# Altium PCB esp32_master.PcbDoc
Units mm, origin at the board's own origin, x right, y up, seen from the top; angles counter-clockwise.
Board outline 70.74 x 57.28 mm, 2 copper layers (Top Layer, Bottom Layer); 8 components, 10 nets, 60 pads, 0 vias.
Unrouted connection lines stored in the file: 1.
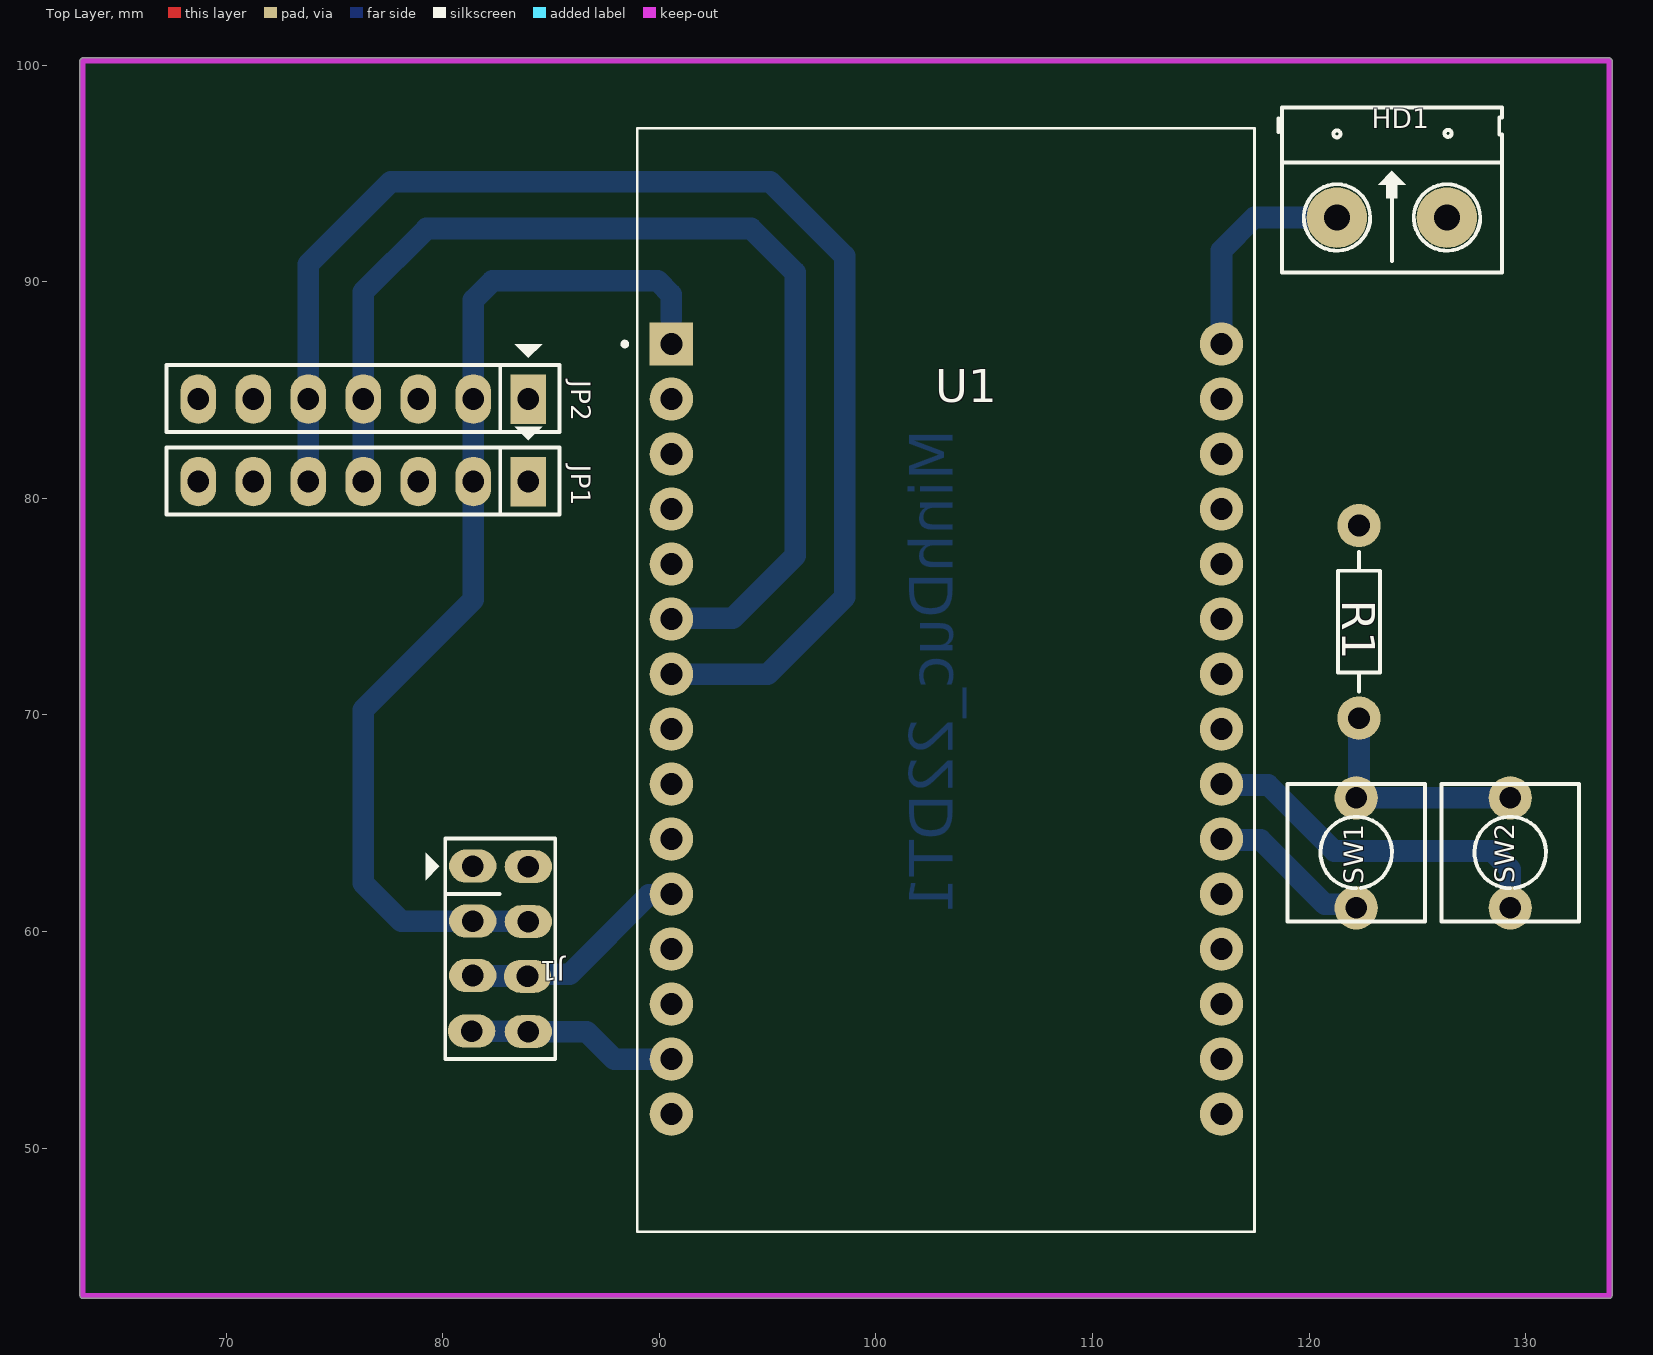
[diagram p0: Top Layer view]
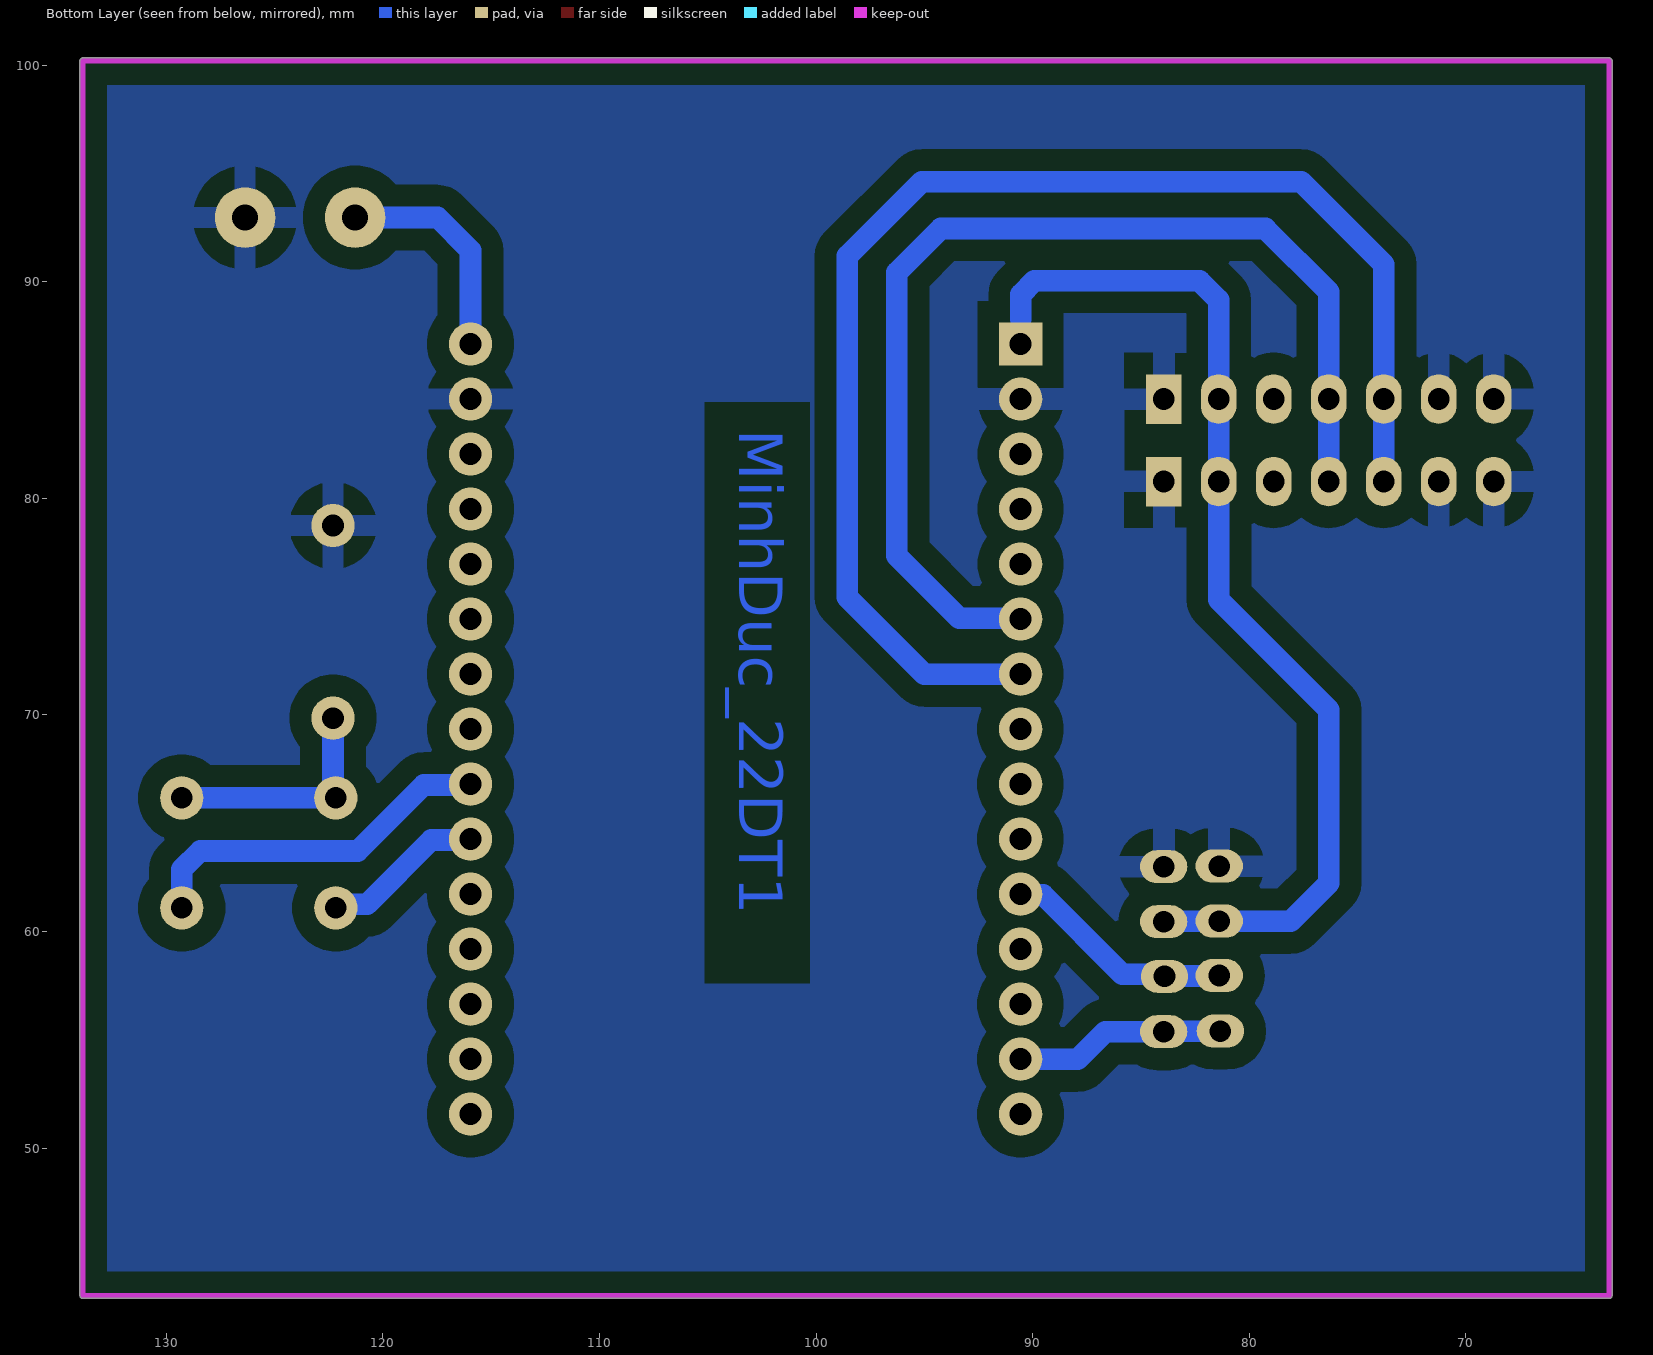
[diagram p1: Bottom Layer view, seen from below]
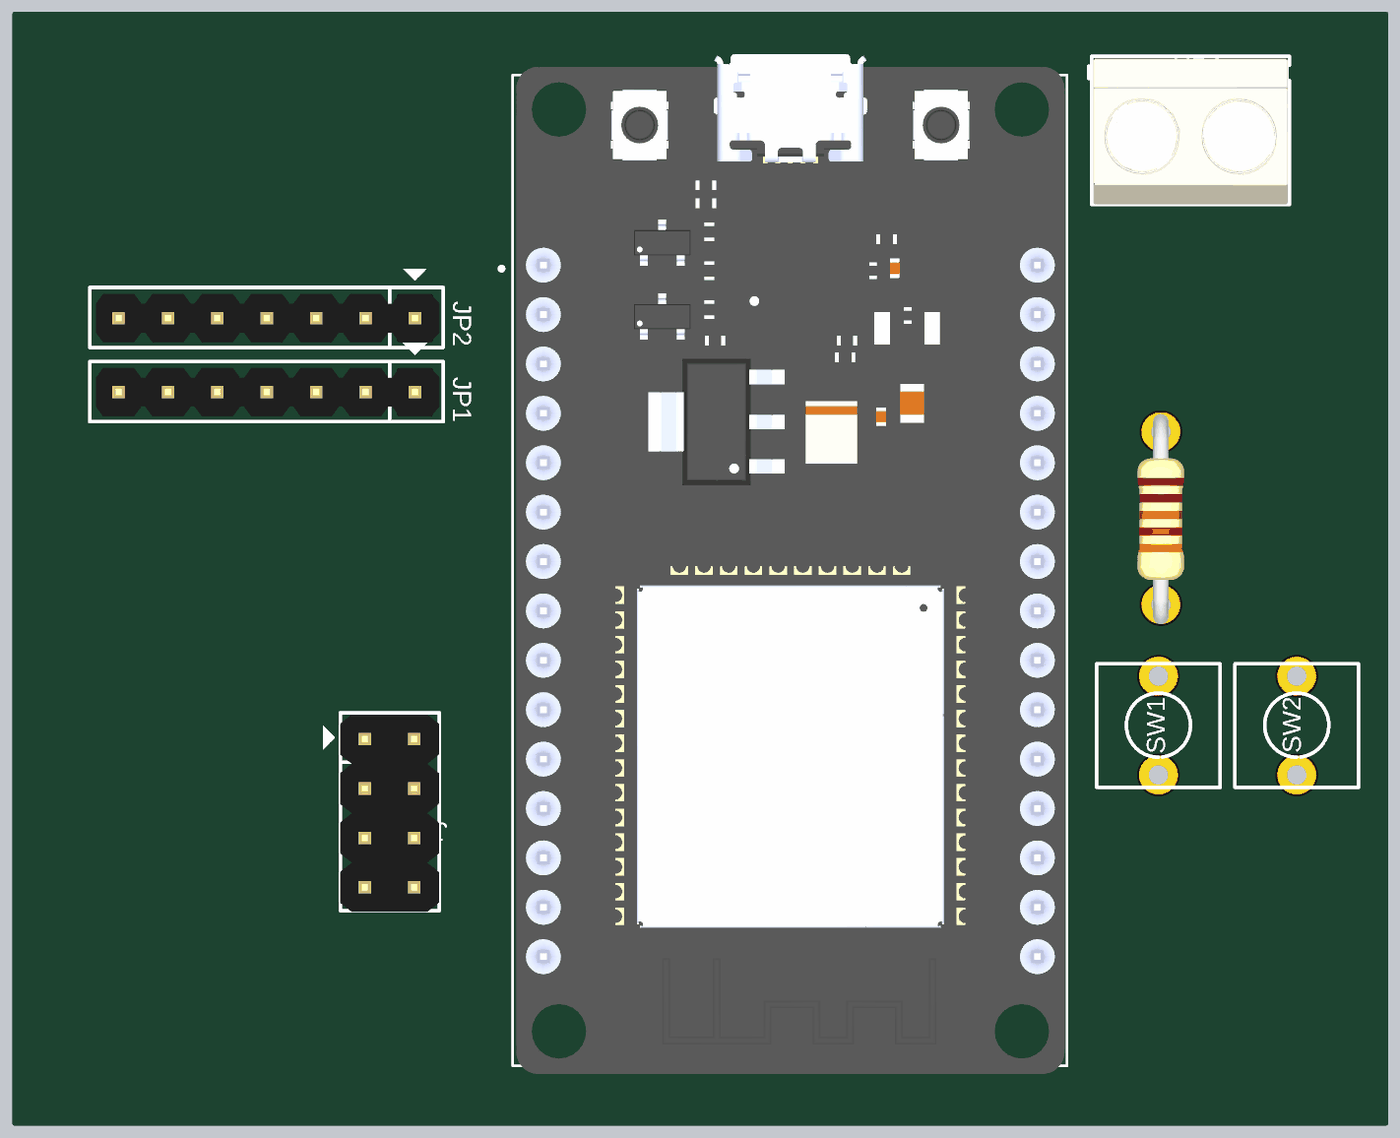
[diagram p2: 3D render of the assembled board from above, using the file's embedded part models]

## Layer stack, top to bottom
Top Solder: solder mask 0.0102, Solder Resist, Dk 3.5
Top Layer: signal copper 0.0356
Dielectric 1: dielectric 0.32, FR-4, Dk 4.8
Bottom Layer: signal copper 0.0356
Bottom Solder: solder mask 0.0102, Solder Resist, Dk 3.5

## Board outline
63.246,43.18 ccw(c63.373,43.18) 63.373,43.053 133.858,43.053 ccw(c133.858,43.18) 133.985,43.18 133.985,100.203 ccw(c133.858,100.203) 133.858,100.33 63.373,100.33 ccw(c63.373,100.203) 63.246,100.203

## Design rules (kind name [scope] priority, off if disabled: settings)
Clearance [All] p1: gap=1 ignorepadtopadclearanceinfootprint=TRUE
PolygonConnect [All] p1: connectstyle=Relief reliefconductorwidth=1 reliefentries=4 polygonreliefangle="90 Angle" airgapwidth=1
RoutingVias [All] p1: holewidth=0.711 width=1.27 viastyle="Through Hole" minholewidth=0.711 minwidth=1.27 maxholewidth=0.711 maxwidth=1.27
SolderMaskExpansion [All] p1: expansion=0.102 istentingtop=FALSE
Width [All] p1: maxlimit=1 minlimit=1 preferedwidth=1
30 further rules are at their usual default settings.

## Components (designator, comment, footprint, x,y, rotation, side; value= is the part's Value field where it differs from the comment)
HD1 "Header 2" HED2 121.285,92.964 r0 top
J1 "Connector 4x2" JP4x2 82.639,59.195 r270 top
JP1 "JP7 PIN" JP7 83.947,80.772 r180 top value=JP7
JP2 "JP7 PIN" JP7 83.947,84.582 r180 top value=JP7
R1 "Res1" R1/4W 122.301,69.85 r90 top value=10K
SW1 "on" SW2 122.174,66.167 r270 top value="SW chip 2 pin"
SW2 "off" SW2 129.286,66.167 r270 top value="SW chip 2 pin"
U1 "ESP32-DEVKIT-V1" MODULE_ESP32_DEVKIT_V1 103.251,71.607 r0 top

## Footprints (in the part's own frame and the unit in brackets; to place one, negate y for a bottom-side part, rotate by r counter-clockwise, add the part's x,y. Pads: shape width x height; smd on the part's side, far side on the other; paste and mask are expansions set on the pad)
HED2 [mil] "Header 2, 2 pin, hight 300mil, Pin to Pin 200, Colour Green"
  round 110 hole 47.24: 1(0,0) 2(200,0)
  silkscreen extent -106,-100 300,200, body extent -97,-100 297,195, height 394
JP4x2 [mil] "Connector 4x2"
  oval 60x86 hole 39.37: 1(-150.5,-49.5) 2(-50.5,-49.5) 3(48.5,-49.5) 4(149.5,-51.5) 5(-149.5,51.5) 6(-49.5,51.5) 7(50,50) 8(150.5,51.5)
  silkscreen extent -201,-135 201,101, body extent -197,-100 203,100, height 335
JP7 [mil] "JP7"
  rect 65x90 hole 39.37: 1(0,0)
  oval 65x90 hole 39.37: 2(100,0) 3(200,0) 4(300,0) 5(400,0) 6(500,0) 7(600,0)
  silkscreen extent -57,-100 658,60, body extent -50,-49 646,49, height 323
MODULE_ESP32_DEVKIT_V1 [mm]
  rect 2x2 / inner round 2 / far side rect 2x2 hole 1.02: 1(-12.7,15.515)
  round 2 hole 1.02: 2(-12.7,12.975) 3(-12.7,10.435) 4(-12.7,7.895) 5(-12.7,5.355) 6(-12.7,2.815) 7(-12.7,0.275) 8(-12.7,-2.265) 9(-12.7,-4.805) 10(-12.7,-7.345) 11(-12.7,-9.885) 12(-12.7,-12.425) 13(-12.7,-14.965) 14(-12.7,-17.505) 15(-12.7,-20.045) 16(12.7,-20.045) 17(12.7,-17.505) 18(12.7,-14.965) 19(12.7,-12.425) 20(12.7,-9.885) 21(12.7,-7.345) 22(12.7,-4.805) 23(12.7,-2.265) 24(12.7,0.275) 25(12.7,2.815) 26(12.7,5.355) 27(12.7,7.895) 28(12.7,10.435) 29(12.7,12.975) 30(12.7,15.515)
  silkscreen extent -14.95,-25.48 14.23,25.48, body extent -14.1,-25.9 14.1,26.55, height 7.05
R1/4W [mm] "R 1/4W, 2 Pin, 350mil"
  round 2 hole 1: 1(0,0) 2(8.89,0)
  silkscreen extent 1.22,-0.97 7.67,0.97, body extent -1.01,-1.19 9.79,1.21, height 2.83
SW2 [mm] "SW button 2pin, 250x 250 mil"
  round 2 hole 1: 1(0,0) 2(5.08,0)
  silkscreen extent -0.64,-3.17 5.72,3.18

## Part data
HD1: library part Hed2, "Header 2 (Green)"
J1: library part JP4x2
JP1 JP2: library part JP7
R1: library part Res1_1, "Resistor", Manufacturer="Generic Components", Class=Passive, Published=08/06/2000, Publisher="Altium Hobart Technology Centre", SubClass=Resistor
SW1 SW2: library part SW2, "Switch button 2 pin"
U1: "Dual core, Wi-Fi: 2.4 GHz up to 150 Mbits/s,BLE (Bluetooth Low Energy) and legacy Bluetooth, 32 bits, Up to 240 MHz", Package=None, Check_prices=https://www.snapeda.com/parts/ESP32-DEVKIT-V1/Do+it/view-part/?ref=eda, MF="Do it", MP=ESP32-DEVKIT-V1, SnapEDA_Link=https://www.snapeda.com/parts/ESP32-DEVKIT-V1/Do+it/view-part/?ref=snap

## Nets (pads, with @x,y where several pads share a name; then routed paths per layer and width w, separated by ;. In a path a pad name is that pad's centre, name@x,y a point inside that pad or via, vN(x,y) a via of type N, cw(c..) or ccw(c..) an arc to the next point about the centre after c; other vN are vias at no path point)
3v3: J1.2 J1.6 JP1.2 JP2.2 U1.1 | length 48.3
  Bottom Layer w1: J1.6 83.934,60.465 81.394,60.465 J1.2 78.08,60.477 76.327,62.23 76.327,70.231 81.407,75.311 JP1.2 JP2.2 81.407,89.154 82.296,90.043 89.916,90.043 90.551,89.408 90.551,88.269
btn1: SW1.2 U1.21 | length 7.5
  Bottom Layer w1: U1.21 115.991,64.222 117.769,64.222 120.731,61.26 122.001,61.26 SW1.2
btn2: SW2.2 U1.22 | length 16.7
  Bottom Layer w1: U1.22 115.991,66.762 118.111,66.762 121.158,63.714 128.437,63.714 129.286,62.865 SW2.2
GND: HD1.2 J1.1 J1.5 JP1.1 JP1.6 JP1.7 JP2.1 JP2.6 JP2.7 R1.2 U1.2 U1.29
NetHD1_1: HD1.1 U1.30 | length 10.3
  Bottom Layer w1: U1.30 115.951,91.44 117.475,92.964 HD1.1
NetR1_1: R1.1 SW1.1 SW2.1 | length 10.8
  Bottom Layer w1: R1.1 122.301,66.294 SW1.1 SW2.1
RX2: JP1.4 JP2.4 U1.6 | length 50.8
  Bottom Layer w1: JP1.4 JP2.4 76.327,89.535 79.248,92.456 94.234,92.456 96.266,90.424 96.266,77.343 93.385,74.462 90.591,74.462 U1.6
SCL: J1.4 J1.8 U1.14 | length 9.8
  Bottom Layer w1: J1.4 81.343,55.385 83.934,55.385 J1.8 86.639,55.372 87.909,54.102 U1.14
SDA: J1.3 J1.7 U1.11 | length 10.8
  Bottom Layer w1: J1.3 81.401,57.944 83.89,57.944 J1.7 84.009,58.025 85.858,58.025 89.515,61.682 90.511,61.682 U1.11
TX2: JP1.5 JP2.5 U1.7 | length 63
  Bottom Layer w1: JP1.5 JP2.5 73.787,90.805 77.597,94.615 95.123,94.615 98.552,91.186 98.552,75.438 94.996,71.882 U1.7
pads on no net: JP1.3 JP2.3 U1.3 U1.4 U1.5 U1.8 U1.9 U1.10 U1.12 U1.13 U1.15 U1.16 U1.17 U1.18 U1.19 U1.20 U1.23 U1.24 U1.25 U1.26 U1.27 U1.28

## Polygon pours and split planes (outlines as drawn)
GND on Bottom Layer "NONET_L01_P-001" (solid, pour order 0): 63.373,100.203 133.858,100.203 133.858,43.18 63.373,43.18

## Keep-outs
Keep-Out Layer:
  lines w0.254: 63.373,43.18 133.858,43.18 133.858,100.203 63.373,100.203 63.373,43.18

## Other copper
Bottom Layer:
  text "MinhDuc_22DT1" at 103.553,83.185 h2 r90